# EAGLE board Rele-TTL+opto (EAGLE 7.2.0)
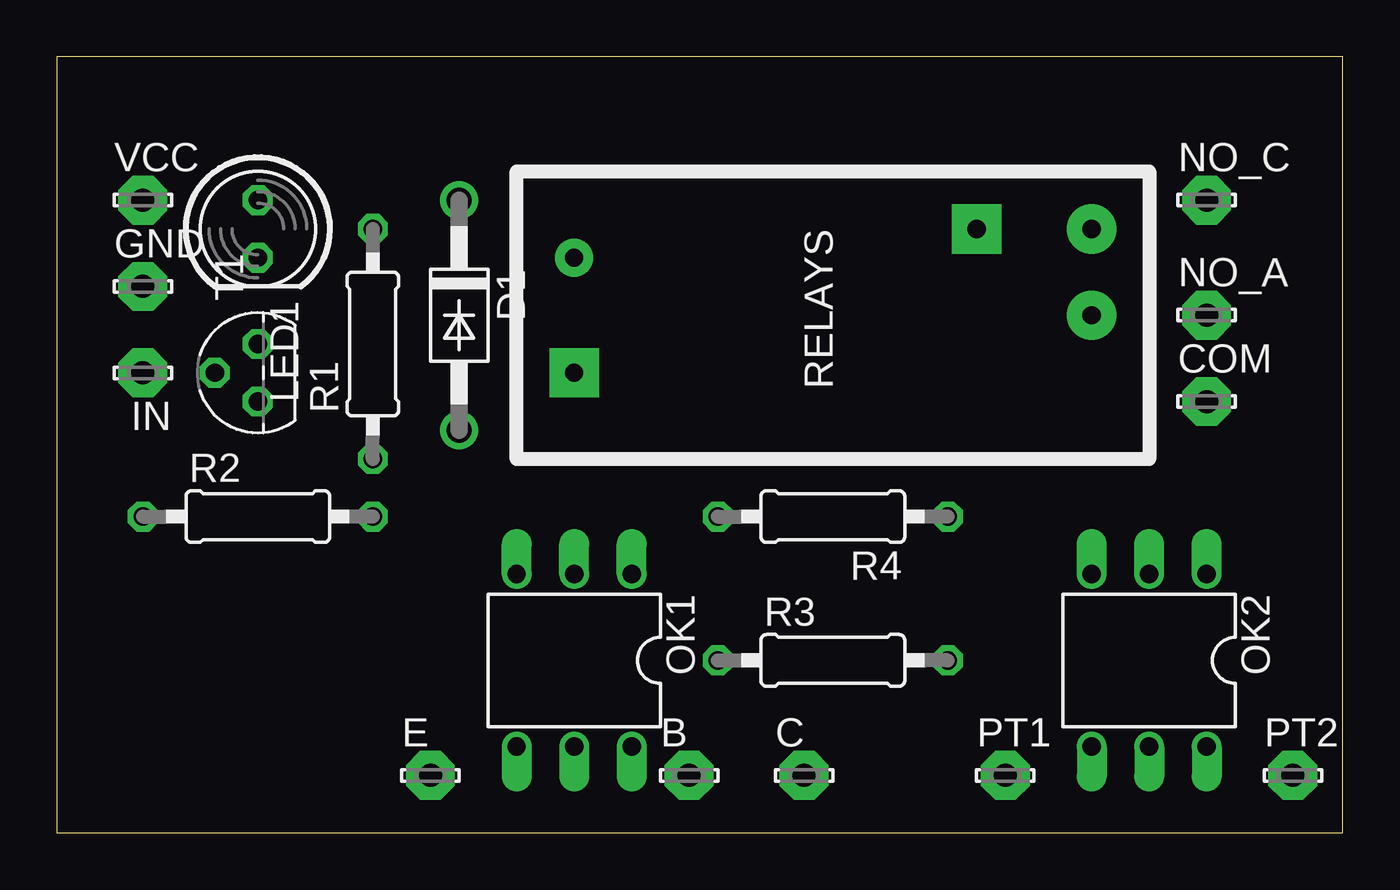
[diagram p0: board, top side]
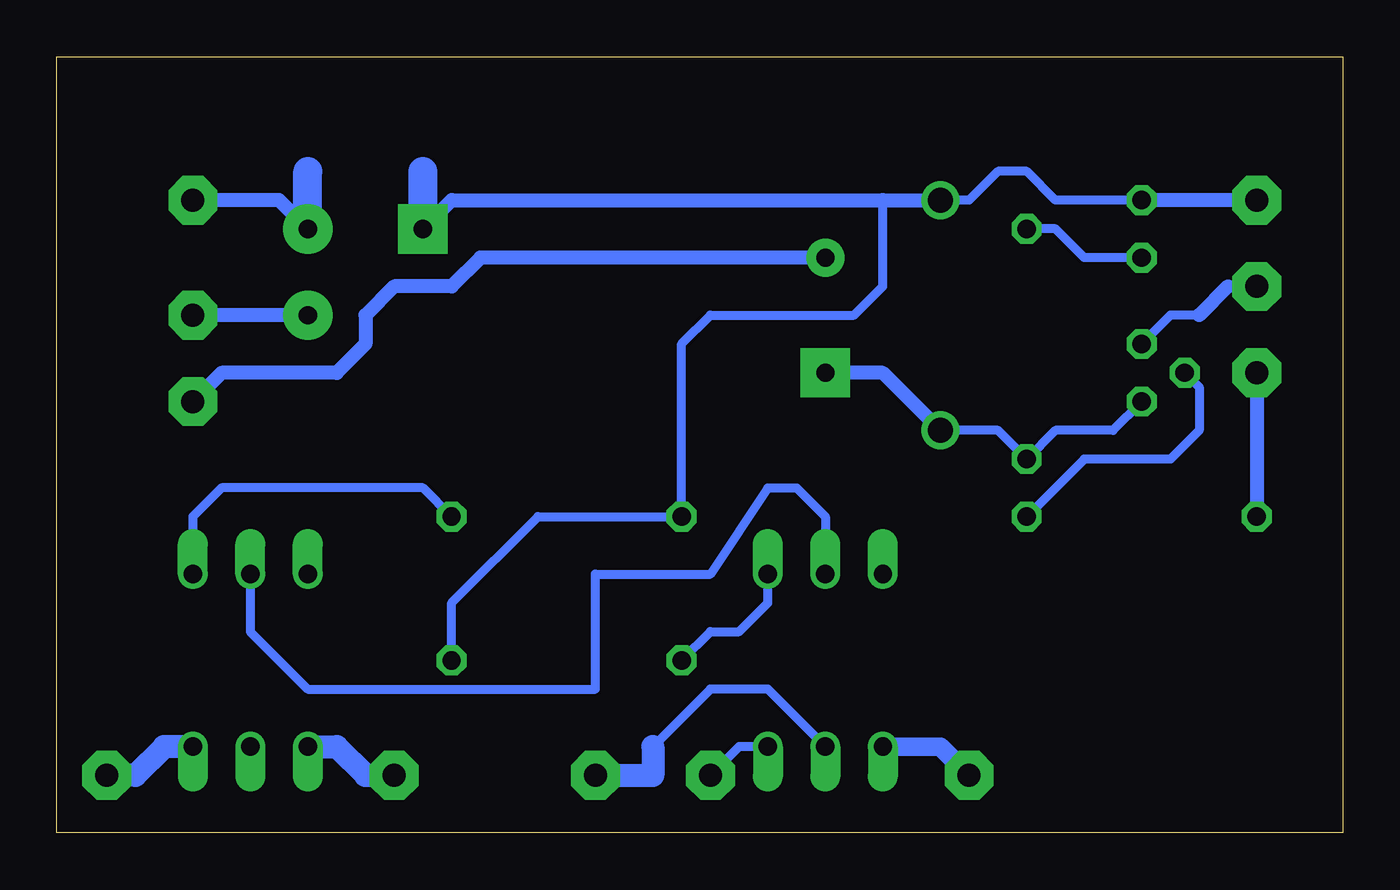
[diagram p1: board, bottom side, seen from below]

Size 56.82 x 34.28 mm. Coordinates in mm from the lower left corner, seen from the top.
Outline: 0,0 56.82,0 56.82,34.28 0,34.28 0,0
Copper layers (1*16): Top 0.035mm / dielectric 1.5mm / Bottom 0.035mm
Design rules "default": minimum track width 10mil, minimum drill 24mil, track to track 8mil, track to pad 8mil, pad to pad 8mil, via to via 8mil, smd to smd 8mil, copper to edge 40mil, drill to drill 8mil, minimum pad ring 10mil, minimum via ring 8mil, stop-mask expansion 4mil, vias tented up to drill 0mil, thermal gap 10mil

## Footprints (pad centres in the part's own frame; a part is rotated, then mirrored left to right if it is on the bottom)
LSP10 = drill 1.016 pad 2.159 octagon: MP 0,0
DO41-10 = drill 1.118: A 5.08,0; C -5.08,0
LED5MM = drill 0.813 octagon: A -1.27,0; K 1.27,0
DIL06 = drill 0.813 offset: 1 -2.54,-3.81; 2 0,-3.81; 3 2.54,-3.81; 4 2.54,3.81; 5 0,3.81; 6 -2.54,3.81
0207/10 = drill 0.813 octagon: 1 -5.08,0; 2 5.08,0
RELE_1 = drill 0.8 pad 1.676: C -8.89,7.62 | drill 0.8 pad 2.184 square: LA -10.16,25.4; LB -3.81,7.62 | drill 0.8 pad 2.184: NA -6.35,30.48; NC -10.16,30.48
TO92 = drill 0.813 octagon: 1 1.27,0; 2 0,1.905; 3 -1.27,0

## Placement (x,y rotation side)
B  LSP10  [LSP10]  27.94,2.54 0 top
C  LSP10  [LSP10]  33.02,2.54 0 top
COM  LSP10  [LSP10]  50.8,19.05 0 top
D1  1N4004  [DO41-10]  17.78,22.86 270 top
E  LSP10  [LSP10]  16.51,2.54 0 top
GND  LSP10  [LSP10]  3.81,24.13 0 top
IN  LSP10  [LSP10]  3.81,20.32 180 top
LED1  red  [LED5MM]  8.89,26.67 270 top
NO_A  LSP10  [LSP10]  50.8,22.86 0 top
NO_C  LSP10  [LSP10]  50.8,27.94 0 top
OK1  4N25M  [DIL06]  22.86,7.62 180 top
OK2  MOC3020M  [DIL06]  48.26,7.62 180 top
PT1  LSP10  [LSP10]  41.91,2.54 0 top
PT2  LSP10  [LSP10]  54.61,2.54 0 top
R1  220  [0207/10]  13.97,21.59 90 top
R2  4K7  [0207/10]  8.89,13.97 0 top
R3  220  [0207/10]  34.29,7.62 0 top
R4  220  [0207/10]  34.29,13.97 180 top
RL1  RELE  [RELE_1]  15.24,16.51 270 top
T1  BC547  [TO92]  8.89,20.32 90 top
VCC  LSP10  [LSP10]  3.81,27.94 0 top

## Library data of the parts
B C COM E GND IN NO_A NO_C PT1 PT2 VCC = solpad
D1 = diode
LED1 = led
OK1 = optocoupler; MPN: 4N25-M; OC_FARNELL: 1021349; OC_NEWARK: 98K9084
OK2 = optocoupler; MF: FAIRCHILD SEMICONDUCTOR; MPN: MOC3020-M; OC_FARNELL: 1505425; OC_NEWARK: 72K8895
R1-R4 = resistor
RL1 = Erik
T1 = transistor

## Nets
N$1: LED1.K R1.2
N$2: COM.MP RL1.C
N$3: R2.2 T1.2
N$4: D1.A R1.1 RL1.LB T1.3
N$5: NO_A.MP RL1.NA
N$6: NO_C.MP RL1.NC
N$7: IN.MP R2.1
N$9: OK1.2 OK2.2
N$10: D1.C LED1.A R3.2 R4.2 RL1.LA VCC.MP
N$11: OK2.1 R4.1
N$12: GND.MP T1.1
N$13: OK1.1 R3.1
N$15: E.MP OK1.4
N$16: C.MP OK1.5
N$17: OK2.4 PT1.MP
N$18: OK2.6 PT2.MP
N$19: B.MP OK1.6

## Tracks (layer width: path | path; a pad name or v marks a point on that pad's centre or on a via)
N$1
  Bottom 0.406: LED1.K 11.43,25.4 12.7,26.67 R1.2
N$2
  Bottom 0.61: RL1.C 38.1,25.4 39.37,24.13 41.91,24.13 43.18,22.86 43.18,21.59 44.45,20.32 49.53,20.32 COM.MP
N$3
  Bottom 0.406: T1.2 6.35,19.69 6.35,17.78 7.62,16.51 11.43,16.51 R2.2
N$4
  Bottom 0.406: T1.3 10.16,17.78 12.7,17.78 R1.1 15.24,17.78 D1.A
  Bottom 0.61: D1.A 20.32,20.32 RL1.LB
N$5
  Bottom 0.61: RL1.NA NO_A.MP
N$6
  Bottom 0.61: RL1.NC 46.99,27.94 NO_C.MP
  Bottom 1.27: RL1.NC 45.72,29.21
N$7
  Bottom 0.61: IN.MP R2.1
N$9
  Bottom 0.406: OK2.2 48.26,8.89 45.72,6.35 33.02,6.35 33.02,11.43 27.94,11.43 25.4,15.24 24.13,15.24 22.86,13.97 OK1.2
N$10
  Bottom 0.406: LED1.A 12.7,27.94 13.97,29.21 15.24,29.21 16.51,27.94 D1.C | R3.2 39.37,10.16 35.56,13.97 R4.2 29.21,21.59 27.94,22.86 21.59,22.86 20.32,24.13 20.32,27.94
  Bottom 0.61: RL1.LA 39.37,27.94 20.32,27.94 D1.C | VCC.MP LED1.A
  Bottom 1.27: RL1.LA 40.64,29.21
N$11
  Bottom 0.406: R4.1 40.64,15.24 49.53,15.24 50.8,13.97 OK2.1
N$12
  Bottom 0.406: GND.MP 5.08,24.13 | 6.35,22.86 7.62,22.86 T1.1
  Bottom 0.61: 5.08,24.13 6.35,22.86
N$13
  Bottom 0.406: R3.1 27.94,8.89 26.67,8.89 25.4,10.16 OK1.1
N$15
  Bottom 0.813: E.MP 17.78,3.81 OK1.4
N$16
  Bottom 0.406: OK1.5 25.4,6.35 27.94,6.35 30.48,3.81
  Bottom 1.016: 30.48,3.81 30.48,2.54 C.MP
N$17
  Bottom 1.016: OK2.4 44.45,3.81 43.18,2.54 PT1.MP
N$18
  Bottom 1.016: OK2.6 52.07,3.81 53.34,2.54 PT2.MP
N$19
  Bottom 0.406: OK1.6 26.67,3.81 B.MP